# EAGLE board Ex 8 LED.PCB.SMD.OPM-AMP (EAGLE 7.2.0)

Size 27 x 35 mm. Coordinates in mm from the lower left corner, seen from the top.
Outline: 27,0 27,35 0,35 0,0 27,0
Copper layers (1*16): Top 0.035mm / dielectric 1.5mm / Bottom 0.035mm
Design rules "default": minimum track width 10mil, minimum drill 24mil, track to track 8mil, track to pad 8mil, pad to pad 8mil, via to via 8mil, smd to smd 8mil, copper to edge 40mil, drill to drill 8mil, minimum pad ring 10mil, minimum via ring 8mil, stop-mask expansion 4mil, vias tented up to drill 0mil, thermal gap 10mil

## Footprints (pad centres in the part's own frame; a part is rotated, then mirrored left to right if it is on the bottom)
1X10-BIG = drill 1.016 pad 1.778 octagon: 1 -11.43,0; 2 -8.89,0; 3 -6.35,0; 4 -3.81,0; 5 -1.27,0; 6 1.27,0; 7 3.81,0; 8 6.35,0; 9 8.89,0; 10 11.43,0
CHIPLED_0805 = smd 1.2 x 1.2: A 0,-1.05; C 0,1.05
R0805 = smd 1.1 x 1.4: 1 -1,0; 2 1,0
SO14 = smd 0.6 x 2.2: 1 -3.81,-2.6; 2 -2.54,-2.6; 3 -1.27,-2.6; 4 0,-2.6; 5 1.27,-2.6; 6 2.54,-2.6; 7 3.81,-2.6; 8 3.81,2.6; 9 2.54,2.6; 10 1.27,2.6; 11 0,2.6; 12 -1.27,2.6; 13 -2.54,2.6; 14 -3.81,2.6

## Placement (x,y rotation side)
NUSBIO_IN  PINHD-1X10  [1X10-BIG]  13.5,3 180 top
NUSBIO_OUT  PINHD-1X10  [1X10-BIG]  13.5,33 180 top
O_L1  [CHIPLED_0805]  22,21 0 top
O_L2  [CHIPLED_0805]  19.5,21 0 top
O_L3  [CHIPLED_0805]  17,21 0 top
O_L4  [CHIPLED_0805]  14.5,21 0 top
O_L5  [CHIPLED_0805]  12,21 0 top
O_L6  [CHIPLED_0805]  9.5,21 0 top
O_L7  [CHIPLED_0805]  7,21 0 top
O_L8  [CHIPLED_0805]  4.5,21 0 top
OB_R_2  [R0805]  19.5,16 90 top
OB_R_3  [R0805]  17,16 90 top
OP_AMP1  LM2902D  [SO14]  20,8.5 0 top
OP_AMP2  LM2902D  [SO14]  7.09,8.5 0 top
RED_L1  [CHIPLED_0805]  2,21 0 top
RED_L2  [CHIPLED_0805]  24.5,21 0 top
RL1  [R0805]  22,16 90 top
RL4  [R0805]  14.5,16 90 top
RL5  [R0805]  12,16 90 top
RL6  [R0805]  9.5,16 90 top
RL7  [R0805]  7,16 90 top
RL8  [R0805]  4.5,16 90 top
RP_L1_1K  [R0805]  2,16 90 top
RP_L2_1K  [R0805]  24.5,16 90 top

## Library data of the parts
NUSBIO_IN NUSBIO_OUT O_L1-O_L8 OB_R_2 OB_R_3 RED_L1 RED_L2 RL1 RL4-RL8 RP_L1_1K RP_L2_1K = adafruit
OP_AMP1 OP_AMP2 = linear

## Nets
GND: NUSBIO_IN.10 NUSBIO_OUT.10 OB_R_2.1 OB_R_3.1 OP_AMP1.11 OP_AMP2.11 RL1.1 RL4.1 RL5.1 RL6.1 RL7.1 RL8.1 RP_L1_1K.1 RP_L2_1K.1
N$1: O_L1.A OP_AMP1.1 OP_AMP1.2
N$2: O_L1.C RL1.2
N$3: NUSBIO_IN.1 NUSBIO_OUT.1 OP_AMP1.3
N$4: NUSBIO_IN.2 NUSBIO_OUT.2 OP_AMP1.5
N$5: NUSBIO_IN.3 NUSBIO_OUT.3 OP_AMP1.10
N$6: NUSBIO_IN.4 NUSBIO_OUT.4 OP_AMP1.12
N$7: NUSBIO_IN.5 NUSBIO_OUT.5 OP_AMP2.3
N$8: NUSBIO_IN.6 NUSBIO_OUT.6 OP_AMP2.5
N$9: NUSBIO_IN.7 NUSBIO_OUT.7 OP_AMP2.10
N$10: NUSBIO_IN.8 NUSBIO_OUT.8 OP_AMP2.12
N$11: NUSBIO_IN.9 NUSBIO_OUT.9 OP_AMP1.4 OP_AMP2.4 RED_L1.A RED_L2.A
N$12: O_L2.A OP_AMP1.6 OP_AMP1.7
N$14: O_L3.A OP_AMP1.8 OP_AMP1.9
N$15: O_L3.C OB_R_3.2
N$16: O_L4.A OP_AMP1.13 OP_AMP1.14
N$18: O_L5.A OP_AMP2.1 OP_AMP2.2
N$19: O_L5.C RL5.2
N$20: O_L6.A OP_AMP2.6 OP_AMP2.7
N$21: O_L6.C RL6.2
N$22: O_L7.A OP_AMP2.8 OP_AMP2.9
N$23: O_L7.C RL7.2
N$24: O_L8.A OP_AMP2.13 OP_AMP2.14
N$25: O_L8.C RL8.2
N$26: RED_L1.C RP_L1_1K.2
N$27: RED_L2.C RP_L2_1K.2
O_L2: O_L2.C OB_R_2.2
O_L4: O_L4.C RL4.2

## Tracks (layer width: path | path; a pad name or v marks a point on that pad's centre or on a via)
GND  (13 unrouted)
N$1  (2 unrouted)
N$2  (1 unrouted)
N$3  (2 unrouted)
N$4  (2 unrouted)
N$5  (2 unrouted)
N$6  (2 unrouted)
N$7  (2 unrouted)
N$8  (2 unrouted)
N$9  (2 unrouted)
N$10  (2 unrouted)
N$11  (5 unrouted)
N$12  (2 unrouted)
N$14  (2 unrouted)
N$15  (1 unrouted)
N$16  (2 unrouted)
N$18  (2 unrouted)
N$19  (1 unrouted)
N$20  (2 unrouted)
N$21  (1 unrouted)
N$22  (2 unrouted)
N$23  (1 unrouted)
N$24  (2 unrouted)
N$25  (1 unrouted)
N$26  (1 unrouted)
N$27  (1 unrouted)
O_L2  (1 unrouted)
O_L4  (1 unrouted)

## Text on the board
tNames: GND | VCC | 7 | 6 | 5 | 4 | 3 | 2 | 1 | 0 | Nusbio | Nusbio | On Board LED Panel | + | + | www.MadeInTheUSB.net | PCBv1 | GND | VCC | 7 | 6 | 5 | 4 | 3 | 2 | 1 | 0